# EAGLE board PCB v33 (EAGLE 9.7.0)
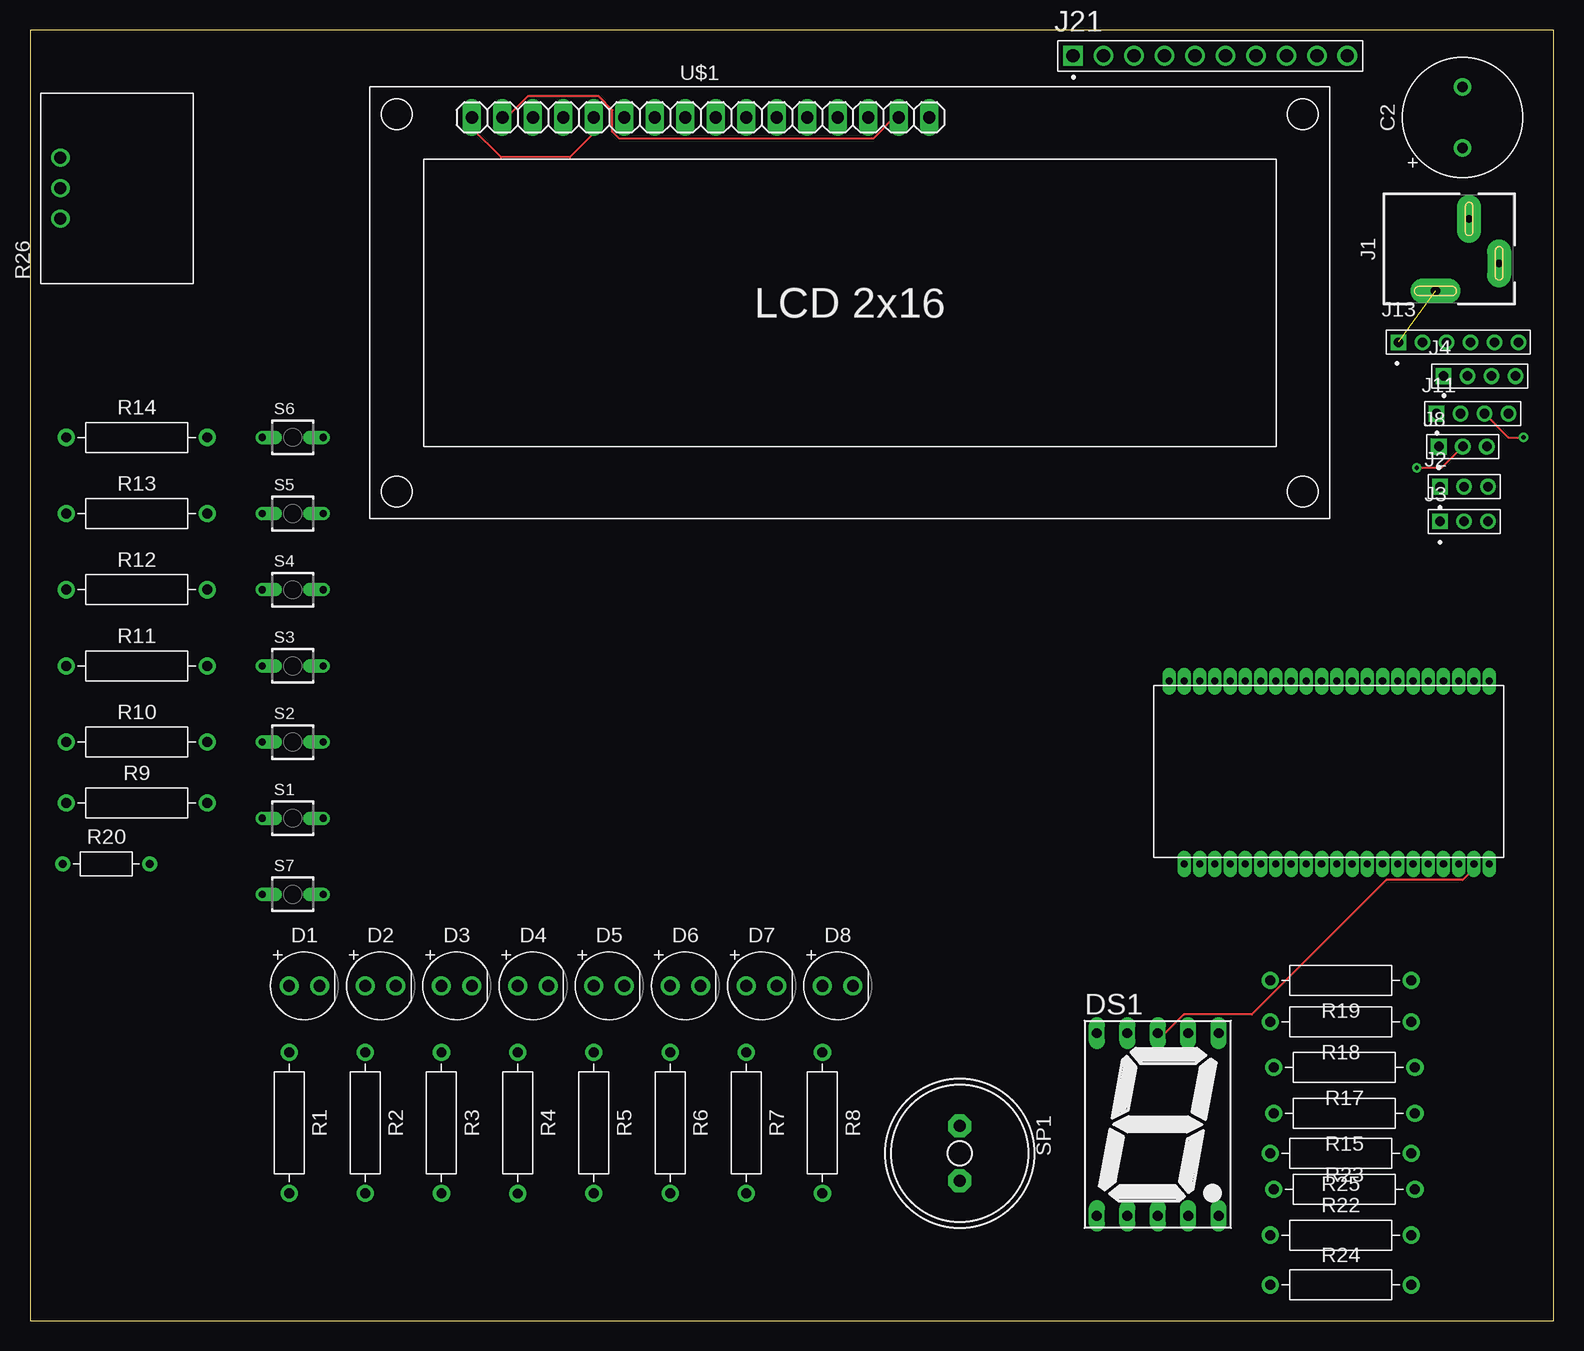
[diagram p0: board, top side]
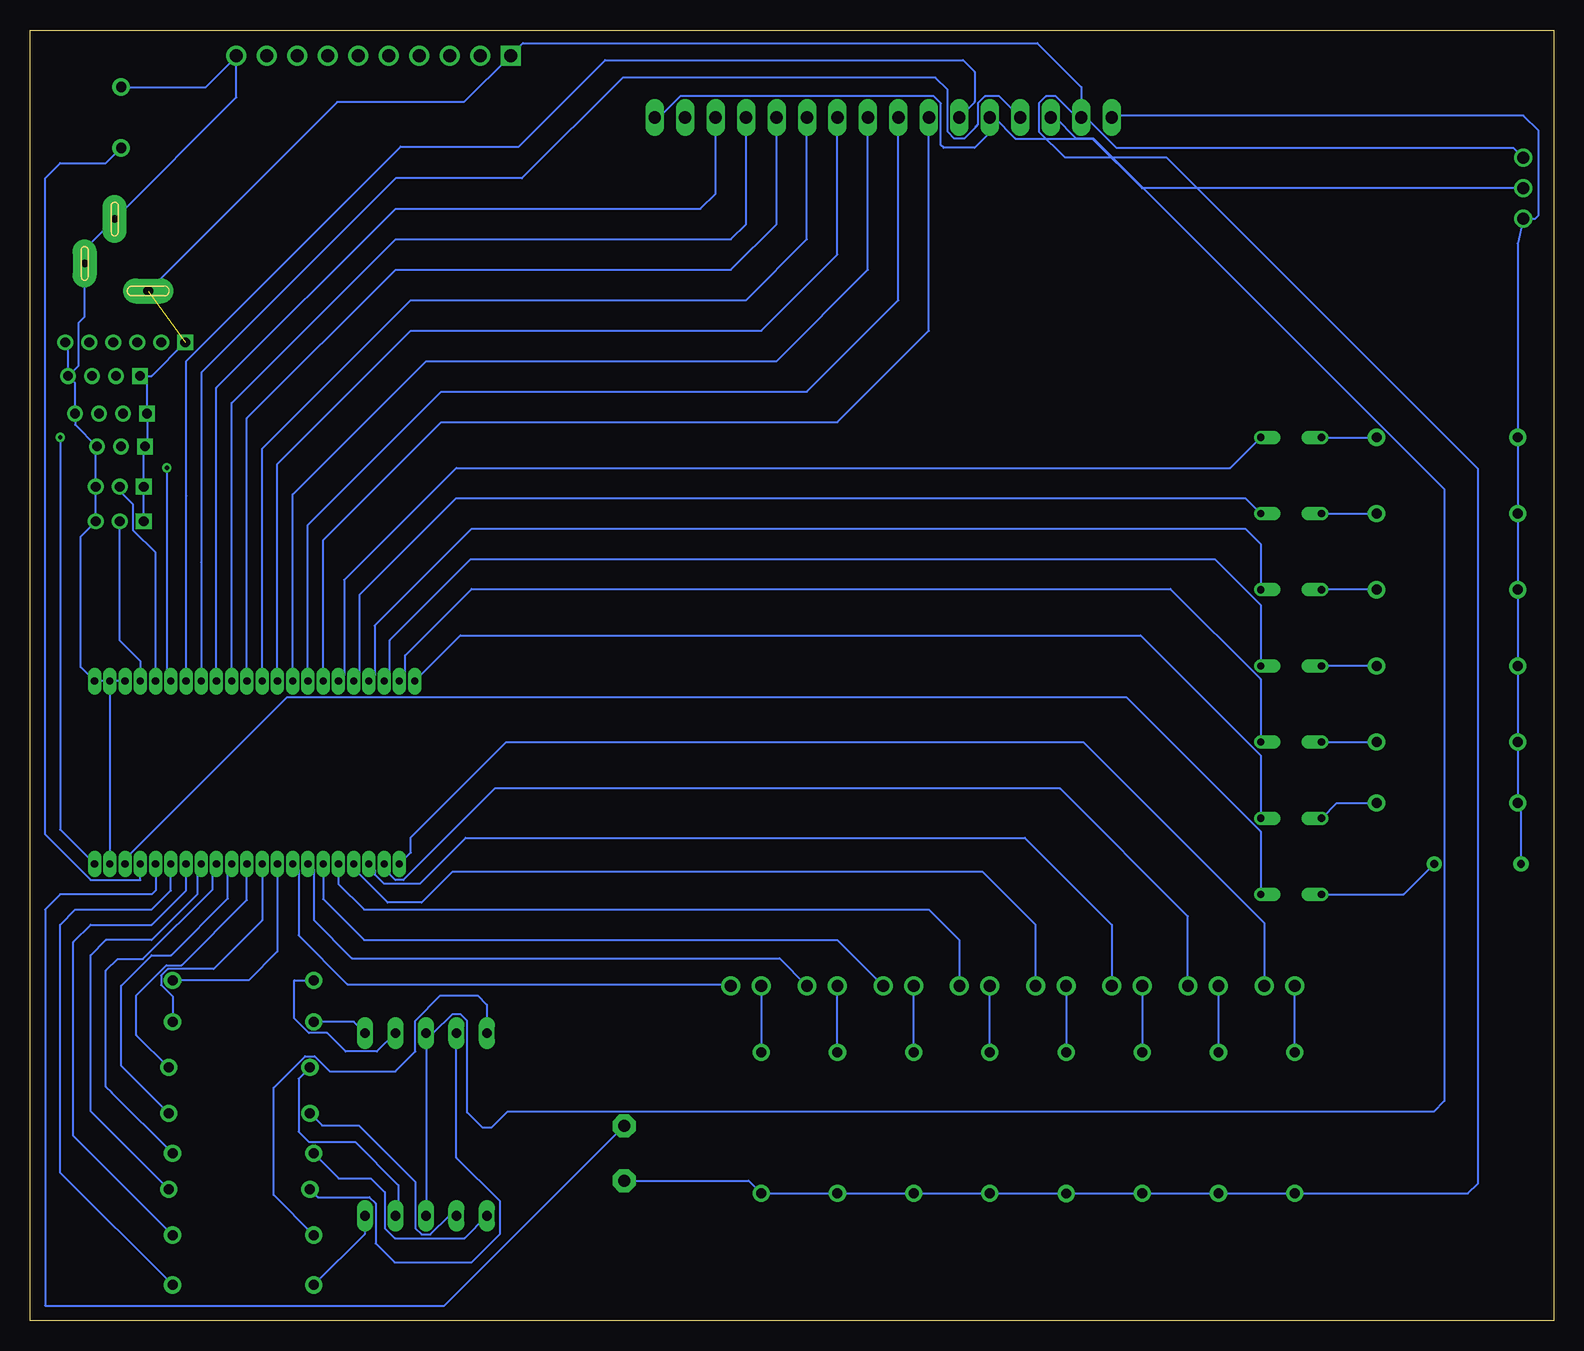
[diagram p1: board, bottom side, seen from below]

Size 126.98 x 107.62 mm. Coordinates in mm from the lower left corner, seen from the top.
Outline: 119.62,90.76 119.62,92.96 119.62,92.99 119.63,93.01 119.63,93.04 119.64,93.06 119.65,93.09 119.66,93.11 119.68,93.13 119.69,93.16 119.71,93.17 119.73,93.19 119.75,93.21 119.77,93.22 119.8,93.23 119.82,93.24 119.85,93.25 119.87,93.26 119.9,93.26 119.92,93.26 119.95,93.26 119.98,93.26 120,93.25 120.03,93.24 120.05,93.23 120.07,93.22 120.1,93.21 120.12,93.19 120.14,93.17 120.15,93.16 120.17,93.13 120.18,93.11 120.2,93.09 120.21,93.06 120.21,93.04 120.22,93.01 120.22,92.99 120.22,92.96 120.22,90.76 120.22,90.74 120.22,90.71 120.21,90.68 120.21,90.66 120.2,90.64 120.18,90.61 120.17,90.59 120.15,90.57 120.14,90.55 120.12,90.53 120.1,90.52 120.07,90.5 120.05,90.49 120.03,90.48 120,90.47 119.98,90.47 119.95,90.46 119.92,90.46 119.9,90.46 119.87,90.47 119.85,90.47 119.82,90.48 119.8,90.49 119.77,90.5 119.75,90.52 119.73,90.53 119.71,90.55 119.69,90.57 119.68,90.59 119.66,90.61 119.65,90.64 119.64,90.66 119.63,90.68 119.63,90.71 119.62,90.74 119.62,90.76
Outline: 115.77,85.46 115.74,85.46 115.71,85.47 115.67,85.48 115.64,85.49 115.6,85.5 115.57,85.52 115.54,85.53 115.52,85.56 115.49,85.58 115.47,85.6 115.45,85.63 115.43,85.66 115.41,85.69 115.4,85.73 115.39,85.76 115.38,85.79 115.38,85.83 115.37,85.86 115.38,85.9 115.38,85.93 115.39,85.97 115.4,86 115.41,86.03 115.43,86.06 115.45,86.09 115.47,86.12 115.49,86.14 115.52,86.17 115.54,86.19 115.57,86.21 115.6,86.22 115.64,86.24 115.67,86.25 115.71,86.26 115.74,86.26 115.77,86.26 118.47,86.26 118.51,86.26 118.54,86.26 118.58,86.25 118.61,86.24 118.64,86.22 118.67,86.21 118.7,86.19 118.73,86.17 118.76,86.14 118.78,86.12 118.8,86.09 118.82,86.06 118.84,86.03 118.85,86 118.86,85.97 118.87,85.93 118.87,85.9 118.87,85.86 118.87,85.83 118.87,85.79 118.86,85.76 118.85,85.73 118.84,85.69 118.82,85.66 118.8,85.63 118.78,85.6 118.76,85.58 118.73,85.56 118.7,85.53 118.67,85.52 118.64,85.5 118.61,85.49 118.58,85.48 118.54,85.47 118.51,85.46 118.47,85.46 115.77,85.46
Outline: 122.12,87.06 122.12,89.26 122.12,89.29 122.13,89.31 122.13,89.34 122.14,89.36 122.15,89.39 122.16,89.41 122.18,89.43 122.19,89.45 122.21,89.47 122.23,89.49 122.25,89.51 122.27,89.52 122.3,89.53 122.32,89.54 122.35,89.55 122.37,89.56 122.4,89.56 122.42,89.56 122.45,89.56 122.48,89.56 122.5,89.55 122.53,89.54 122.55,89.53 122.57,89.52 122.6,89.51 122.62,89.49 122.64,89.47 122.65,89.45 122.67,89.43 122.68,89.41 122.7,89.39 122.71,89.36 122.71,89.34 122.72,89.31 122.72,89.29 122.72,89.26 122.72,87.06 122.72,87.04 122.72,87.01 122.71,86.98 122.71,86.96 122.7,86.94 122.68,86.91 122.67,86.89 122.65,86.87 122.64,86.85 122.62,86.83 122.6,86.82 122.57,86.8 122.55,86.79 122.53,86.78 122.5,86.77 122.48,86.77 122.45,86.76 122.42,86.76 122.4,86.76 122.37,86.77 122.35,86.77 122.32,86.78 122.3,86.79 122.27,86.8 122.25,86.82 122.23,86.83 122.21,86.85 122.19,86.87 122.18,86.89 122.16,86.91 122.15,86.94 122.14,86.96 122.13,86.98 122.13,87.01 122.12,87.04 122.12,87.06
Outline: 0,107.62 0,0 126.98,0 126.98,107.62 0,107.62
Copper layers (1*16): Top / Bottom
Stack-up Default Layer Stack: Top User Defined 0.035mm / Dielectric-1 User Defined 1.5mm / Bottom User Defined 0.035mm
Design rules "default": minimum track width 6mil, minimum drill 0.35mm, track to track 6mil, track to pad 6mil, pad to pad 6mil, via to via 6mil, smd to smd 6mil, copper to edge 40mil, drill to drill 6mil, minimum pad ring 10mil, minimum via ring 8mil, stop-mask expansion 4mil, vias tented up to drill 0mil, thermal gap 10mil

## Footprints (pad centres in the part's own frame; a part is rotated, then mirrored left to right if it is on the bottom)
CAPPRD508W65D1000H1100B = drill 0.85 pad 1.45: 1 -2.54,0; 2 2.54,0
LEDRD254W60D565H860B_G = drill 0.981 pad 1.581: 1 -1.27,0; 2 1.27,0
7SEG-13 = drill 0.813 long: 1 -5.08,-7.62; 2 -2.54,-7.62; 3 0,-7.62; 4 2.54,-7.62; 5 5.08,-7.62; 6 5.08,7.62; 7 2.54,7.62; 8 0,7.62; 9 -2.54,7.62; 10 -5.08,7.62
694106402002 = drill 0.8 pad 2.1 long: 1 -3.5,0 | drill 0.6 pad 2 long: 2 -1.2,-5.3; 3 2.5,-2.8
62000311121 = drill 0.8 square: 1 -2,0 | drill 0.8: 2 0,0; 3 2,0
62000411121 = drill 0.8 square: 1 -3,0 | drill 0.8: 2 -1,0; 3 1,0; 4 3,0
62000611121 = drill 0.8 square: 1 -5,0 | drill 0.8: 2 -3,0; 3 -1,0; 4 1,0; 5 3,0; 6 5,0
61301011121 = drill 1.1 square: 1 -11.43,0 | drill 1.1: 2 -8.89,0; 3 -6.35,0; 4 -3.81,0; 5 -1.27,0; 6 1.27,0; 7 3.81,0; 8 6.35,0; 9 8.89,0; 10 11.43,0
RESAD1176W63L850D250B = drill 0.83 pad 1.43: 1 -5.88,0; 2 5.88,0
RESAD724W46L381D178B = drill 0.66 pad 1.26: 1 -3.62,0; 2 3.62,0
91A1A-B28-B15L-ND = drill 1: 1 2.54,0; 2 0,0; 3 -2.54,0
SWITCH-OMRON_B3U-1000P = drill 0.6 offset: P$1 -2.54,0; P$3 2.54,0
AL11P = drill 1.016 pad 1.905 octagon: + 2.286,0; - -2.286,0
QFN48-0.4MM = drill 0.6 long: 0 3.81,2.54; 1 3.81,27.94; 2 3.81,26.67; 3 3.81,25.4; 4 3.81,24.13; 5 3.81,22.86; 6 3.81,21.59; 7 3.81,20.32; 8 3.81,19.05; 9 3.81,7.62; 10 19.05,29.21; 11 19.05,27.94; 12 19.05,26.67; 13 19.05,25.4; 14 19.05,24.13; 15 19.05,22.86; 16 3.81,17.78; 17 3.81,16.51; 18 3.81,15.24; 19 3.81,13.97; 20 3.81,12.7; 21 3.81,11.43; 22 3.81,6.35; 23 3.81,5.08; 24 3.81,3.81; 25 19.05,5.08; 26 3.81,10.16; 27 19.05,3.81; 28 19.05,2.54; 33 3.81,8.89; 34 19.05,21.59; 35 19.05,20.32; 36 19.05,19.05; 37 19.05,17.78; 38 19.05,16.51; 39 19.05,15.24; 40 19.05,13.97; 41 19.05,12.7; 42 19.05,11.43; 43 19.05,10.16; 44 19.05,8.89; 45 19.05,7.62; 46 19.05,6.35
JHD-162A = drill 1.016 long: 1 -19.05,0; 2 -16.51,0; 3 -13.97,0; 4 -11.43,0; 5 -8.89,0; 6 -6.35,0; 7 -3.81,0; 8 -1.27,0; 9 1.27,0; 10 3.81,0; 11 6.35,0; 12 8.89,0; 13 11.43,0; 14 13.97,0; 15 16.51,0; 16 19.05,0

## Placement (x,y rotation side)
C2  [CAPPRD508W65D1000H1100B]  119.38,100.33 90 top
D1  [LEDRD254W60D565H860B_G]  22.86,27.94 0 top
D2  [LEDRD254W60D565H860B_G]  29.21,27.94 0 top
D3  [LEDRD254W60D565H860B_G]  35.56,27.94 0 top
D4  [LEDRD254W60D565H860B_G]  41.91,27.94 0 top
D5  [LEDRD254W60D565H860B_G]  48.26,27.94 0 top
D6  [LEDRD254W60D565H860B_G]  54.61,27.94 0 top
D7  [LEDRD254W60D565H860B_G]  60.96,27.94 0 top
D8  [LEDRD254W60D565H860B_G]  67.31,27.94 0 top
DS1  7SEG-CA  [7SEG-13]  93.98,16.38 0 top
J1  [694106402002]  117.12,89.36 90 top
J2  62000311121  [62000311121]  119.5,69.55 0 top
J3  62000311121  [62000311121]  119.5,66.65 0 top
J4  62000411121  [62000411121]  120.8,78.77 0 top
J8  62000311121  [62000311121]  119.4,72.9 0 top
J11  62000411121  [62000411121]  120.22,75.64 0 top
J13  62000611121  [62000611121]  119.04,81.58 0 top
J21  61301011121  [61301011121]  98.35,105.47 0 top
R1  1k  [RESAD1176W63L850D250B]  21.59,16.51 270 top
R2  1k  [RESAD1176W63L850D250B]  27.94,16.51 270 top
R3  1k  [RESAD1176W63L850D250B]  34.29,16.51 270 top
R4  1k  [RESAD1176W63L850D250B]  40.64,16.5 270 top
R5  1k  [RESAD1176W63L850D250B]  46.99,16.51 270 top
R6  1k  [RESAD1176W63L850D250B]  53.34,16.51 270 top
R7  1k  [RESAD1176W63L850D250B]  59.69,16.51 270 top
R8  1k  [RESAD1176W63L850D250B]  66.04,16.51 270 top
R9  10k  [RESAD1176W63L850D250B]  8.89,43.18 0 top
R10  10k  [RESAD1176W63L850D250B]  8.89,48.26 0 top
R11  10k  [RESAD1176W63L850D250B]  8.89,54.61 0 top
R12  10k  [RESAD1176W63L850D250B]  8.89,60.96 0 top
R13  10k  [RESAD1176W63L850D250B]  8.89,67.31 0 top
R14  10k  [RESAD1176W63L850D250B]  8.89,73.66 0 top
R15  20  [RESAD1176W63L850D250B]  109.53,17.32 180 top
R17  20  [RESAD1176W63L850D250B]  109.53,21.13 180 top
R18  20  [RESAD1176W63L850D250B]  109.22,24.94 180 top
R19  20  [RESAD1176W63L850D250B]  109.22,28.4 180 top
R20  10k  [RESAD724W46L381D178B]  6.35,38.1 0 top
R22  20  [RESAD1176W63L850D250B]  109.22,7.16 0 top
R23  20  [RESAD1176W63L850D250B]  109.53,10.97 0 top
R24  20  [RESAD1176W63L850D250B]  109.22,3 0 top
R25  20  [RESAD1176W63L850D250B]  109.22,13.97 180 top
R26  91A1A-B28-B15L  [91A1A-B28-B15L-ND]  2.54,94.42 90 top
S1  SWITCH-OMRON_B3U-1000P  [SWITCH-OMRON_B3U-1000P]  21.89,41.91 0 top
S2  SWITCH-OMRON_B3U-1000P  [SWITCH-OMRON_B3U-1000P]  21.89,48.26 0 top
S3  SWITCH-OMRON_B3U-1000P  [SWITCH-OMRON_B3U-1000P]  21.89,54.61 0 top
S4  SWITCH-OMRON_B3U-1000P  [SWITCH-OMRON_B3U-1000P]  21.89,60.96 0 top
S5  SWITCH-OMRON_B3U-1000P  [SWITCH-OMRON_B3U-1000P]  21.89,67.31 0 top
S6  SWITCH-OMRON_B3U-1000P  [SWITCH-OMRON_B3U-1000P]  21.89,73.66 0 top
S7  SWITCH-OMRON_B3U-1000P  [SWITCH-OMRON_B3U-1000P]  21.89,35.57 0 top
SP1  AL11P  [AL11P]  77.47,13.97 270 top
U1  ESP32  [QFN48-0.4MM]  124.14,34.29 90 top
U$1  LCD-16X2JHD-162A  [JHD-162A]  55.88,100.33 0 top

## Library data of the parts
C2 = Capacitor; CATEGORY: Capacitor
D1-D8 = Library
DS1 = Opto-Electronic; CATEGORY: Opto-Electronic; SUB-CATEGORY: Display; TYPE: 7-Segment
J1 = Connector; CATEGORY: Connector; DESCRIPTION: DC POWER JACK - VERTICAL - THT - 2.0 & 2.5Ø - WR-DC; MANUFACTURER: Würth Elektronik; MPN: 694106402002; OPERATING_TEMPERATURE: -40°C to +85°C; PART_STATUS: Active; ROHS_COMPLIANCE: RoHS Compliant; SERIES: WR-DC; SUBCATEGORY: Power Connector; TYPE: Vertical
J2 J3 J8 = Headers; CREATED_BY: PCBLayout.com; MANUFACTURER: Würth Elektronik; MPN: 62000311121
J4 J11 = Headers; CREATED_BY: PCBLayout.com; MANUFACTURER: Würth Elektronik; MPN: 62000411121
J13 = Headers; CREATED_BY: PCBLayout.com; MANUFACTURER: Würth Elektronik; MPN: 62000611121
J21 = Headers; CREATED_BY: PCBLayout.com; DIGIKEY_PART_NUMBER: 732-2670-ND; MANUFACTURER: Wurth Electronics Inc.; MPN: 61301011121
R1-R15 R17-R19 R22-R25 = Resistor; CATEGORY: Resistor; SUB-CATEGORY: Fixed
R20 = Resistor; CATEGORY: Resistor; SPICEPREFIX: R; SUB-CATEGORY: Fixed
R26 = Potentiometer_Trimmers; CREATED_BY: PCBLayout.com; DIGIKEY_PARTNO: 91A1A-B28-B15L-ND; MANUFACTURER: Bourns Inc.; MPN: 91A1A-B28-B15L
S1-S7 = 52101-101-REV-A_v16
SP1 = buzzer; OC_FARNELL: unknown; OC_NEWARK: unknown
U1 = ESP32-S2; PROD_ID: IC-13338
U$1 = Tinkercad

## Nets
3V3: C2.1 U1.22
+5V: J1.1 J2.1 J3.1 J4.1 J8.1 J11.1 J13.1 J21.1 R1.2 R2.2 R3.2 R4.2 R5.2 R6.2 R7.2 R8.2 R26.1 SP1.+ U$1.2 U$1.15
GND: C2.2 DS1.3 DS1.8 J1.2 J1.3 J2.3 J3.3 J4.4 J8.3 J11.4 J13.6 J21.10 R9.1 R10.1 R11.1 R12.1 R13.1 R14.1 R20.1 R26.3 U1.24 U1.25 U1.27 U1.28 U$1.1 U$1.5 U$1.16
GPIO0: J11.3 U1.0
GPIO1: D1.2 U1.1
GPIO2: D2.2 U1.2
GPIO3: D3.2 U1.3
GPIO4: D4.2 U1.4
GPIO5: D5.2 U1.5
GPIO6: D6.2 U1.6
GPIO7: D7.2 U1.7
GPIO8: D8.2 U1.8
GPIO9: SP1.- U1.9
GPIO10: S1.P$3 U1.10
GPIO11: S2.P$3 U1.11
GPIO12: S3.P$3 U1.12
GPIO13: S4.P$3 U1.13
GPIO14: S5.P$3 U1.14
GPIO15: S6.P$3 U1.15
GPIO16: R19.1 U1.16
GPIO17: R18.1 U1.17
GPIO18: R17.1 U1.18
GPIO19: R15.1 U1.19
GPIO20: R25.1 U1.20
GPIO21: R23.2 U1.21
GPIO26: R22.2 U1.26
GPIO33: R24.2 U1.33
GPIO34: U1.34 U$1.7
GPIO35: U1.35 U$1.8
GPIO36: U1.36 U$1.9
GPIO37: U1.37 U$1.10
GPIO38: U1.38 U$1.11
GPIO39: U1.39 U$1.12
GPIO40: U1.40 U$1.13
GPIO41: U1.41 U$1.14
GPIO42: U1.42 U$1.4
GPIO43: U1.43 U$1.6
GPIO44: J8.2 U1.44
GPIO45: J2.2 U1.45
GPIO46: J3.2 U1.46
GPIO47: J4.2
GPIO48: J4.3
GPIO49: J11.2
N$1: D1.1 R1.1
N$2: D2.1 R2.1
N$3: D3.1 R3.1
N$4: D4.1 R4.1
N$5: D5.1 R5.1
N$6: D6.1 R6.1
N$7: D7.1 R7.1
N$8: D8.1 R8.1
N$9: U1.23
N$10: R9.2 S1.P$1
N$11: R10.2 S2.P$1
N$12: R11.2 S3.P$1
N$13: R12.2 S4.P$1
N$14: R13.2 S5.P$1
N$15: R14.2 S6.P$1
N$16: DS1.1 R25.2
N$17: DS1.2 R15.2
N$18: DS1.4 R17.2
N$19: DS1.6 R18.2
N$20: DS1.7 R19.2
N$21: DS1.10 R22.1
N$22: DS1.9 R23.1
N$23: DS1.5 R24.1
N$24: R26.2 U$1.3
N$25: S7.P$3 U1.23
N$26: R20.2
N$27: R20.2 S7.P$1
N$43: J13.2
N$44: J13.3
N$45: J13.4
N$46: J13.5
N$49: J21.2
N$50: J21.3
N$51: J21.4
N$52: J21.5
N$53: J21.6
N$54: J21.7
N$55: J21.8
N$56: J21.9

## Tracks (layer width: path | path; a pad name or v marks a point on that pad's centre or on a via)
3V3
  Bottom 0.152: C2.1 120.65,96.52 124.46,96.52 125.73,95.25 125.73,40.57 121.92,36.76 117.79,36.76 U1.22
+5V  (1 unrouted)
  Top 0.152: U$1.15 72.01,100.33 70.26,98.58 49.12,98.58 48.54,99.16 48.54,100.94 47.4,102.08 41.5,102.08 39.75,100.33 U$1.2
  Bottom 0.152: J3.1 J2.1 117.5,72.8 J8.1 117.22,73.08 J11.1 117.22,78.19 J4.1 116.85,78.77 J13.1 | J1.1 101.39,101.6 90.83,101.6 J21.1 85.9,106.53 43.03,106.53 39.37,102.87 U$1.2 | SP1.+ 67.09,11.68 R8.2 R7.2 R6.2 R5.2 R4.2 R3.2 R2.2 R1.2 7.15,10.63 6.35,11.43 6.35,71.07 32.29,97 40.75,97 42.9,99.16 42.9,101.5 42.32,102.08 41.5,102.08 39.75,100.33 U$1.2 | U$1.2 38.99,100.33 36.45,97.79 3.37,97.79 R26.1
GND
  Top 0.152: U$1.5 46.99,99.01 44.99,97 39.26,97 36.83,99.44 U$1.1 | U1.24 119.84,37.61 119.84,37.22 119.38,36.76 113.04,36.76 101.83,25.55 96.15,25.55 94.6,24 DS1.8
  Bottom 0.152: R20.1 2.73,42.9 R9.1 R10.1 R11.1 R12.1 R13.1 R14.1 3.01,89.81 R26.3 1.56,91.88 1.27,92.17 1.27,99.21 2.54,100.48 36.83,100.48 U$1.1 | DS1.3 DS1.8 93.36,24 91.81,25.55 91.07,25.55 90.55,25.03 90.55,17.39 89.27,16.1 88.53,16.1 87.2,17.44 10.01,17.44 9.11,18.34 9.11,69.34 38.35,98.58 44.86,98.58 46.61,100.33 46.61,100.71 U$1.5 46.99,99.06 48.26,97.79 50.85,97.79 51.08,98.02 51.08,101.5 51.66,102.08 72.8,102.08 74.55,100.33 U$1.16 | U1.25 U1.27 | U1.27 U1.28 122.77,54.51 122.77,65.38 J3.3 J2.3 121.5,72.8 J8.3 123.22,74.72 J11.4 123.22,78.19 J4.4 | U1.27 U1.24 | J1.3 119.92,91.87 | J1.3 122.42,89.36 J1.2 122.42,83.71 122.92,83.22 122.92,79.65 J4.4 | J4.4 123.8,81.34 J13.6 | J1.3 109.78,102 109.78,105.41 | 109.78,105.41 J21.10 | C2.2 112.32,102.87 109.78,105.41
GPIO0  (via drill 0.35)
  Top 0.152: J11.3 123.2,73.66 v124.46,73.66
  Bottom 0.152: v124.46,73.66 124.46,40.96 U1.0
GPIO1
  Bottom 0.152: D1.2 24.13,33.19 39.2,48.26 87.31,48.26 95.25,40.32 95.25,39.05 U1.1
GPIO2
  Bottom 0.152: D2.2 30.48,33.73 41.14,44.38 88.26,44.38 95.88,36.76 96.52,36.76 96.98,37.22 96.98,37.61 U1.2
GPIO3
  Bottom 0.152: D3.2 36.83,33.02 44.08,40.27 90.67,40.27 94.48,36.46 97.49,36.46 98.25,37.22 98.25,37.61 U1.3
GPIO4
  Bottom 0.152: U1.4 100.01,37.71 97.19,34.88 94.35,34.88 91.81,37.42 47.58,37.42 43.18,33.02 D4.2
GPIO5
  Bottom 0.152: D5.2 49.53,31.75 52.07,34.29 99.13,34.29 101.28,36.44 U1.5
GPIO6
  Bottom 0.152: D6.2 59.69,31.75 99.13,31.75 102.55,35.17 U1.6
GPIO7
  Bottom 0.152: D7.2 64.52,30.23 100.15,30.23 103.33,33.41 103.33,37.61 U1.7
GPIO8
  Bottom 0.152: D8.2 68.71,28.07 100.53,28.07 104.6,32.14 104.6,37.61 U1.8
GPIO9
  Bottom 0.152: SP1.- 92.46,1.27 125.73,1.27 125.73,34.29 124.46,35.56 116.84,35.56 116.52,35.88 U1.9
GPIO10
  Bottom 0.152: U1.10 91.12,57.15 34.43,57.15 24.43,47.15 S1.P$3
GPIO11
  Bottom 0.152: S2.P$3 24.43,53.5 31.95,61.03 90.17,61.03 95.71,55.49 95.71,53.83 U1.11
GPIO12
  Bottom 0.152: S3.P$3 24.43,59.69 28.24,63.5 90.24,63.5 96.98,56.76 96.98,53.83 U1.12
GPIO13
  Bottom 0.152: S4.P$3 24.43,64.77 25.7,66.04 90.17,66.04 98.25,57.96 98.25,53.83 U1.13
GPIO14
  Bottom 0.152: S5.P$3 25.7,68.58 91.44,68.58 99.52,60.5 99.52,53.83 U1.14
GPIO15
  Bottom 0.152: S6.P$3 26.97,71.12 91.44,71.12 100.79,61.77 100.79,53.83 U1.15
GPIO16
  Bottom 0.152: R19.1 108.76,28.4 106.36,30.8 U1.16
GPIO17
  Bottom 0.152: U1.17 107.63,33.4 111.68,29.34 115.49,29.34 116.04,28.79 116.04,28.01 115.1,27.07 R18.1
GPIO18
  Bottom 0.152: R17.1 118.11,23.83 118.11,27.16 115.62,29.65 114.35,29.65 108.9,35.1 U1.18
GPIO19
  Bottom 0.152: R15.1 119.38,21.29 119.38,27.94 116.84,30.48 115.22,30.48 110.49,35.21 110.49,37.78 U1.19
GPIO20
  Bottom 0.152: R25.1 120.17,19.04 120.17,19.05 120.65,19.53 120.65,29.21 119.69,30.17 117.58,30.17 111.76,35.99 111.76,37.78 U1.20
GPIO21
  Bottom 0.152: R23.2 121.92,17.48 121.92,30.48 120.65,31.75 116.84,31.75 113.03,35.56 113.03,37.78 U1.21
GPIO26
  Bottom 0.152: R22.2 123.36,15.42 123.36,31.58 121.92,33.02 116.84,33.02 113.98,35.88 U1.26
GPIO33
  Bottom 0.152: R24.2 124.46,12.36 124.46,33.02 123.19,34.29 116.84,34.29 115.25,35.88 U1.33
GPIO34
  Bottom 0.152: U1.34 102.55,65.09 92.71,74.93 59.69,74.93 52.07,82.55 U$1.7
GPIO35
  Bottom 0.152: U1.35 103.82,66.36 92.71,77.47 62.23,77.47 54.61,85.09 U$1.8
GPIO36
  Bottom 0.152: U1.36 105.09,68.9 93.98,80.01 64.77,80.01 57.15,87.63 U$1.9
GPIO37
  Bottom 0.152: U1.37 106.36,71.44 95.25,82.55 66.04,82.55 59.69,88.9 U$1.10
GPIO38
  Bottom 0.152: U1.38 107.63,72.71 95.25,85.09 67.31,85.09 62.23,90.17 U$1.11
GPIO39
  Bottom 0.152: U1.39 108.9,75.25 96.52,87.63 68.58,87.63 64.77,91.44 U$1.12
GPIO40
  Bottom 0.152: U1.40 110.17,76.52 96.52,90.17 68.58,90.17 67.31,91.44 U$1.13
GPIO41
  Bottom 0.152: U1.41 111.44,77.79 96.52,92.71 71.12,92.71 69.85,93.98 U$1.14
GPIO42
  Bottom 0.152: 44.83,100.33 U$1.4 46.2,102.08 47.4,102.08 47.98,101.5 47.98,99.77 48.19,99.56 48.19,99.51 49.12,98.58 49.94,98.58 50.52,99.16 50.52,102.64 51.53,103.66 77.58,103.66 85.98,95.25 96.52,95.25 112.71,79.06 112.71,63.26 U1.42
GPIO43
  Bottom 0.152: U1.43 113.98,68.78 113.96,68.8 113.96,80.03 96.09,97.9 86.25,97.9 79.04,105.1 49.22,105.1 48.26,104.14 48.26,101.65 48.28,101.63 48.28,101.57 U$1.6
GPIO44  (via drill 0.35)
  Top 0.152: J8.2 117.62,71.12 v115.57,71.12
  Bottom 0.152: v115.57,71.12 115.57,53.66 U1.44
GPIO45
  Bottom 0.152: J2.2 119.5,69.17 118.38,68.05 118.38,65.9 116.52,64.04 U1.45
GPIO46
  Bottom 0.152: J3.2 119.5,56.71 117.79,55 U1.46
N$1
  Bottom 0.152: R1.1 D1.1
N$2
  Bottom 0.152: D2.1 R2.1
N$3
  Bottom 0.152: D3.1 R3.1
N$4
  Bottom 0.152: D4.1 R4.1
N$5
  Bottom 0.152: R5.1 D5.1
N$6
  Bottom 0.152: R6.1 D6.1
N$7
  Bottom 0.152: R7.1 D7.1
N$8
  Bottom 0.152: D8.1 R8.1
N$10
  Bottom 0.152: R9.2 18.08,43.18 S1.P$1
N$11
  Bottom 0.152: S2.P$1 R10.2
N$12
  Bottom 0.152: R11.2 S3.P$1
N$13
  Bottom 0.152: R12.2 S4.P$1
N$14
  Bottom 0.152: S5.P$1 R13.2
N$15
  Bottom 0.152: S6.P$1 R14.2
N$16
  Bottom 0.152: R25.2 101.26,11.89 98.57,11.89 97.41,10.73 97.41,7.73 96.58,6.91 90.75,6.91 DS1.1
N$17
  Bottom 0.152: R15.2 102.64,16.31 99.58,16.31 94.87,11.59 94.87,7.73 94.35,7.21 93.61,7.21 92.06,8.76 DS1.2
N$18
  Bottom 0.152: DS1.4 96.29,8.99 96.29,11.31 99.89,14.91 103.73,14.91 104.6,15.78 104.6,20.19 R17.2
N$19
  Bottom 0.152: R18.2 100,24.94 DS1.6
N$20
  Bottom 0.152: R19.2 104.95,28.4 104.95,25.21 103.73,23.99 102.21,23.99 100.67,22.45 98.07,22.45 DS1.7
N$21
  Bottom 0.152: R22.1 106.68,10.5 106.68,19.44 104.04,22.07 103.26,22.07 101.99,20.8 96.53,20.8 94.87,22.47 94.87,25.03 92.77,27.13 89.68,27.13 88.9,26.35 DS1.10
N$22
  Bottom 0.152: DS1.9 91.44,13.6 87.81,9.98 87.81,7.25 90.17,4.89 96.6,4.89 98.17,6.46 98.17,9.79 98.69,10.31 103,10.31 R23.1
N$23
  Bottom 0.152: R24.1 99.06,7.28 DS1.5
N$24
  Bottom 0.152: R26.2 34.3,94.42 38.46,98.58 39.78,98.58 41.53,100.33 U$1.3
N$25
  Bottom 0.152: U1.23 118.57,38.59 118.57,38.98 105.55,52 35.63,52 24.43,40.8 S7.P$3
N$27
  Bottom 0.152: R20.2 12.51,35.56 S7.P$1